# Altium PCB step.PcbDoc
Units mil, origin at the board's own origin, x right, y up, seen from the top; angles counter-clockwise.
Board outline 1340 x 950 mil, 2 copper layers (Top Layer, Bottom Layer); 2 components, 10 nets, 32 pads, 2 vias.
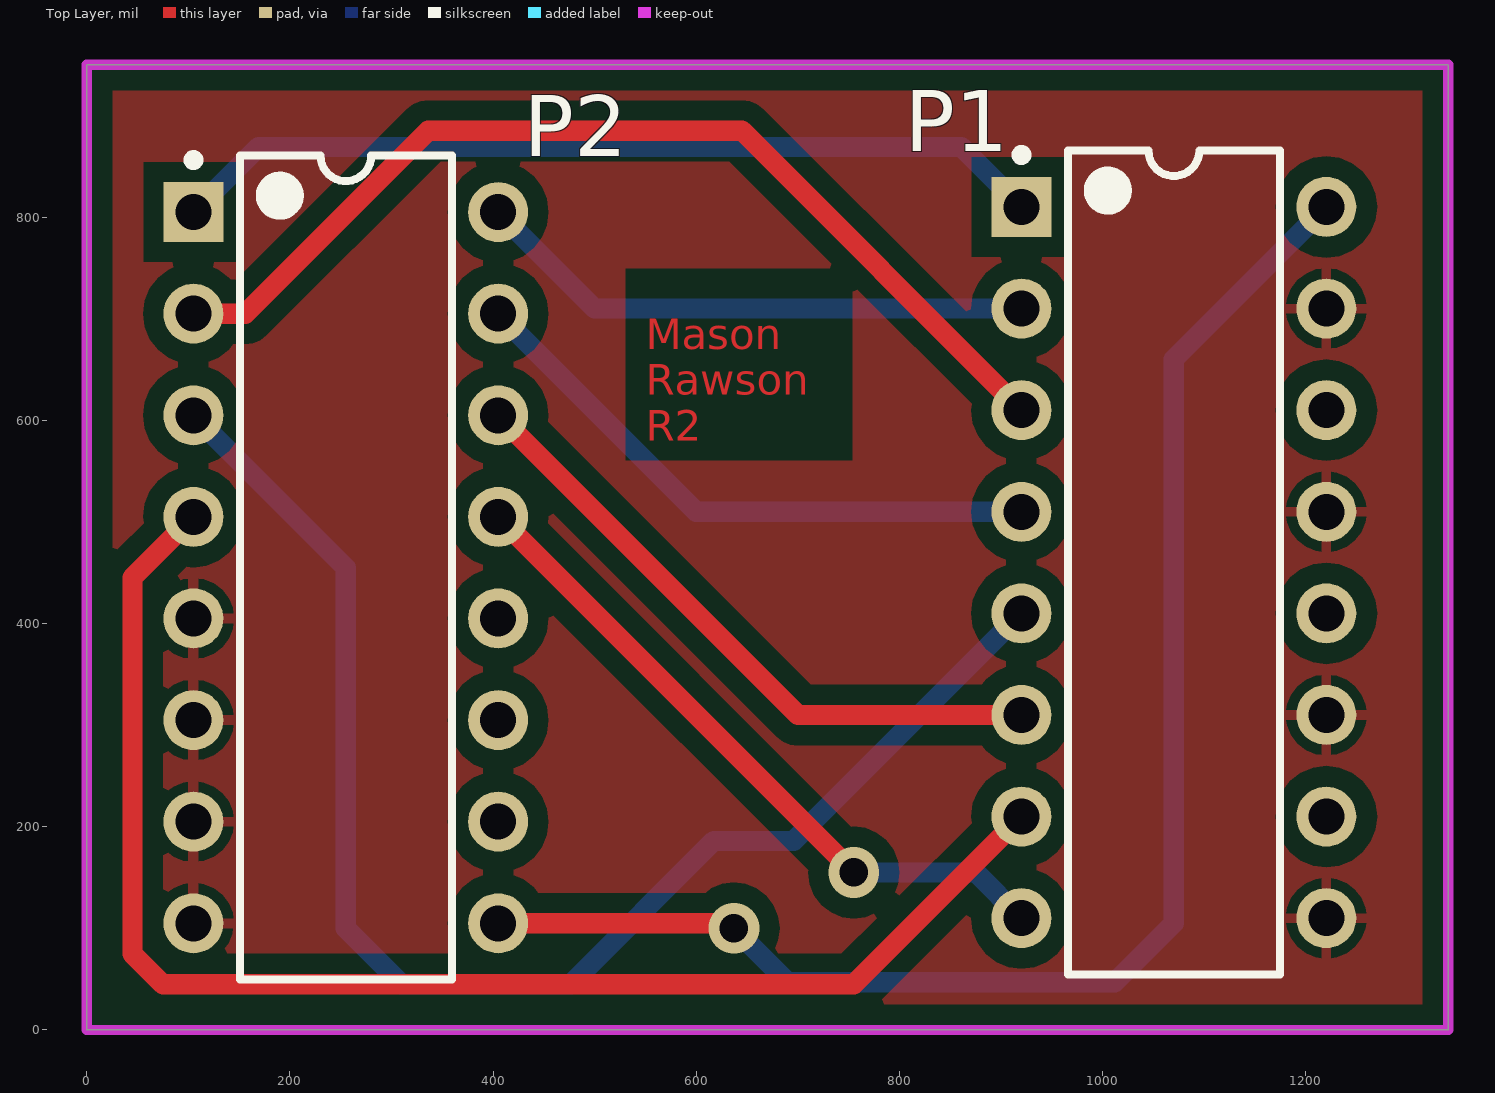
[diagram p0: Top Layer view]
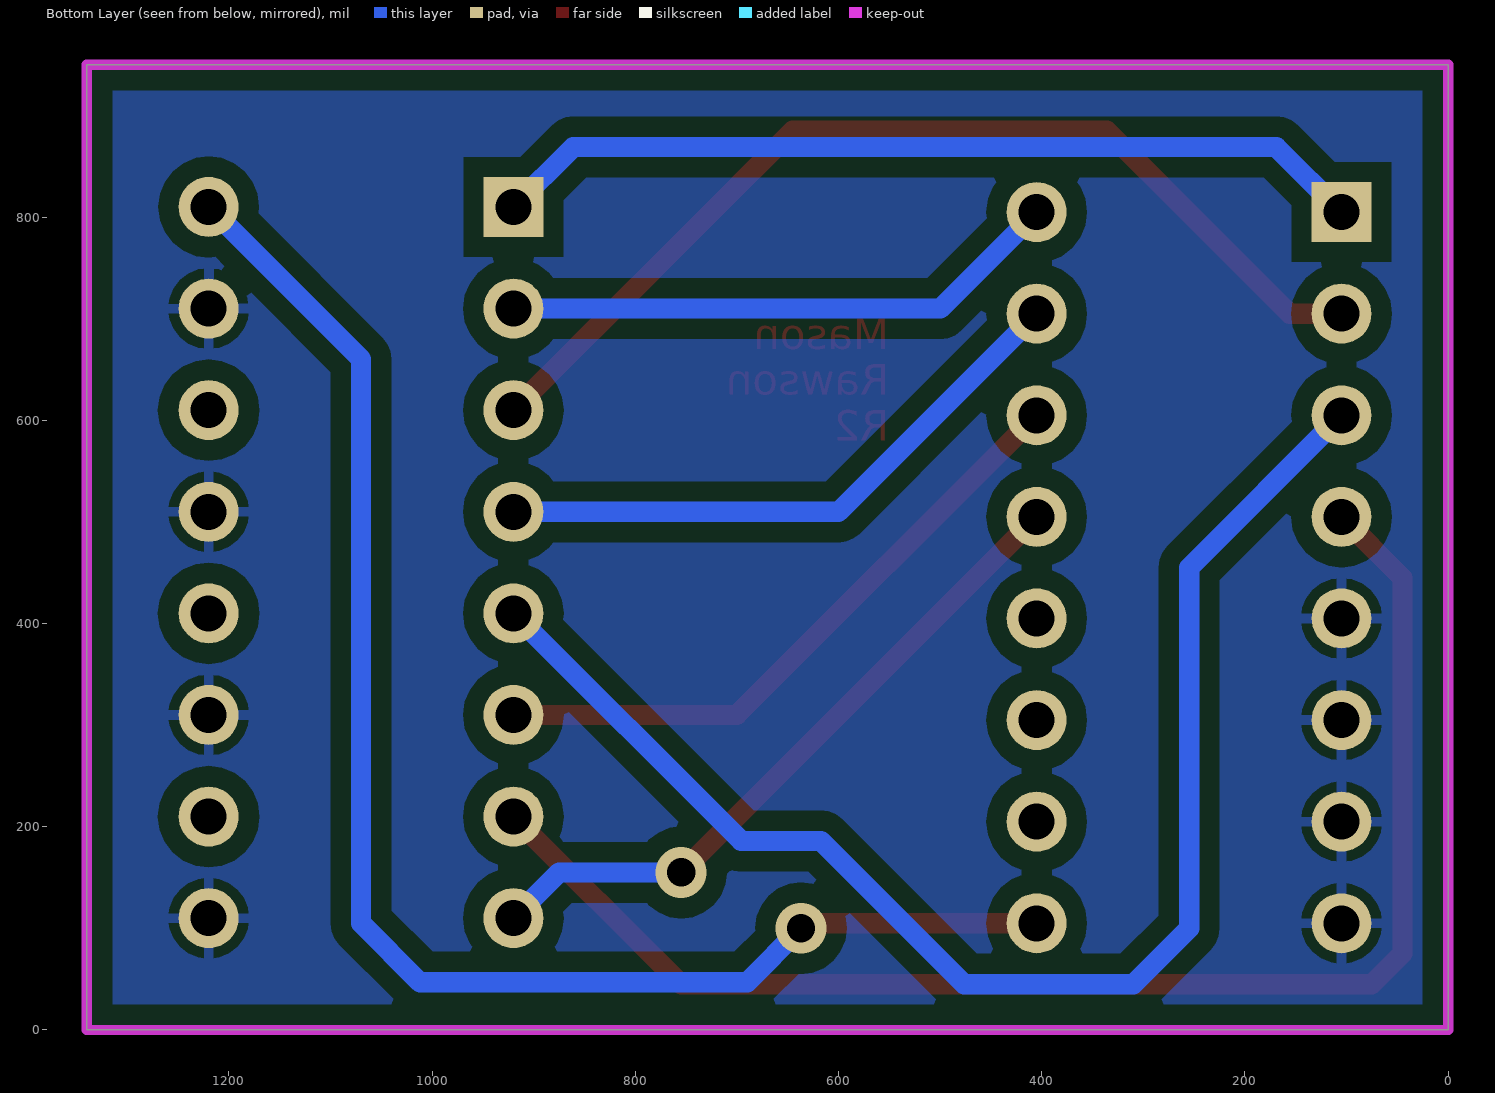
[diagram p1: Bottom Layer view, seen from below]

## Layer stack, top to bottom
Top Solder: solder mask 0.4, Solder Resist, Dk 3.5
Top Layer: signal copper 1.4
Dielectric 1: dielectric 12.6, FR-4, Dk 4.8
Bottom Layer: signal copper 1.4
Bottom Solder: solder mask 0.4, Solder Resist, Dk 3.5

## Board outline
0,0 0,950 1340,950 1340,0

## Design rules (kind name [scope] priority, off if disabled: settings)
Clearance [All] p1: gap=20
PolygonConnect [All] p1: connectstyle=Relief reliefconductorwidth=10 reliefentries=4 polygonreliefangle="90 Angle" airgapwidth=10
RoutingVias [All] p1: holewidth=28 width=50 viastyle="Through Hole" minholewidth=28 minwidth=50 maxholewidth=28 maxwidth=50
SolderMaskExpansion [All] p1: expansion=4
Width [All] p1: maxlimit=20 minlimit=20 preferedwidth=20
30 further rules are at their usual default settings.

## Components (designator, comment, footprint, x,y, rotation, side; value= is the part's Value field where it differs from the comment)
P1 "Header 8X2A" DIP-16 1070,460 r0 top
P2 "Header 8X2A" DIP-16 255,455 r0 top

## Footprints (in the part's own frame and the unit in brackets; to place one, negate y for a bottom-side part, rotate by r counter-clockwise, add the part's x,y. Pads: shape width x height; smd on the part's side, far side on the other; paste and mask are expansions set on the pad)
DIP-16 [mm] "DIP; 16 Leads; Row Spacing 7.62 mm; Pitch 2.54 mm"
  rect 1.5x1.5 hole 0.9: 1(-3.81,8.89)
  round 1.5 hole 0.9: 2(-3.81,6.35) 3(-3.81,3.81) 4(-3.81,1.27) 5(-3.81,-1.27) 6(-3.81,-3.81) 7(-3.81,-6.35) 8(-3.81,-8.89) 9(3.81,-8.89) 10(3.81,-6.35) 11(3.81,-3.81) 12(3.81,-1.27) 13(3.81,1.27) 14(3.81,3.81) 15(3.81,6.35) 16(3.81,8.89)
  silkscreen extent -3.93,-10.3 2.65,10.31, body extent -3.6,-10.28 3.6,10.28, height 5.08

## Part data
P1 P2: "Header, 8-Pin, Dual row"

## Via types
v1: diameter 50, hole 28, Top Layer to Bottom Layer, 2 vias

## Nets (pads, with @x,y where several pads share a name; then routed paths per layer and width w, separated by ;. In a path a pad name is that pad's centre, name@x,y a point inside that pad or via, vN(x,y) a via of type N, cw(c..) or ccw(c..) an arc to the next point about the centre after c; other vN are vias at no path point)
GND: P1.9 P1.11 P1.13 P1.15 P2.5 P2.6 P2.7 P2.8
S_0: P1.1 P2.1 | length 865.9
  Bottom Layer w20: P2.1 169,869 861,869 P1.1
S_1: P1.3 P2.2 | length 1003.5
  Top Layer w20: P2.2 156,705 336,885 645,885 P1.3
S_2: P1.5 P2.3 | length 1406.1
  Bottom Layer w20: P2.3 255,455 255,100 310,45 476.32,45 617.32,186 696,186 P1.5
S_3: P1.7 P2.4 | length 1410.6
  Top Layer w20: P2.4 45,445 45,75 75,45 755,45 P1.7
S_BLUE: P1.2 P2.16 | length 554.4
  Bottom Layer w20: P2.16 500,710 P1.2
S_ORG: P1.8 P2.13 | length 678.6
  Top Layer w20: P2.13 v1(755,155)
  Bottom Layer w20: v1(755,155) 875,155 P1.8
S_PINK: P1.4 P2.15 | length 595.8
  Bottom Layer w20: P2.15 600,510 P1.4
S_RED: P1.16 P2.9 | length 1480.2
  Top Layer w20: P2.9 632,105 v1(637,100)
  Bottom Layer w20: v1(637,100) 690,47 1012,47 1070,105 1070,660 P1.16
S_YEL: P1.6 P2.14 | length 637.2
  Top Layer w20: P2.14 700,310 P1.6
pads on no net: P1.10 P1.12 P1.14 P2.10 P2.11 P2.12

## Polygon pours and split planes (outlines as drawn)
GND on Top Layer "gnd" (solid, pour order 0): 0,0 0,950 1340,950 1340,0
GND on Bottom Layer "gnd" (solid, pour order 2): 0,0 0,950 1340,950 1340,0

## Keep-outs
Keep-Out Layer:
  the board outline again, w10

## Other copper
Top Layer:
  text "Mason / Rawson / R2" at 550,580 h30